# EAGLE board PWM sheild d1 mini v1 (EAGLE 9.6.2)
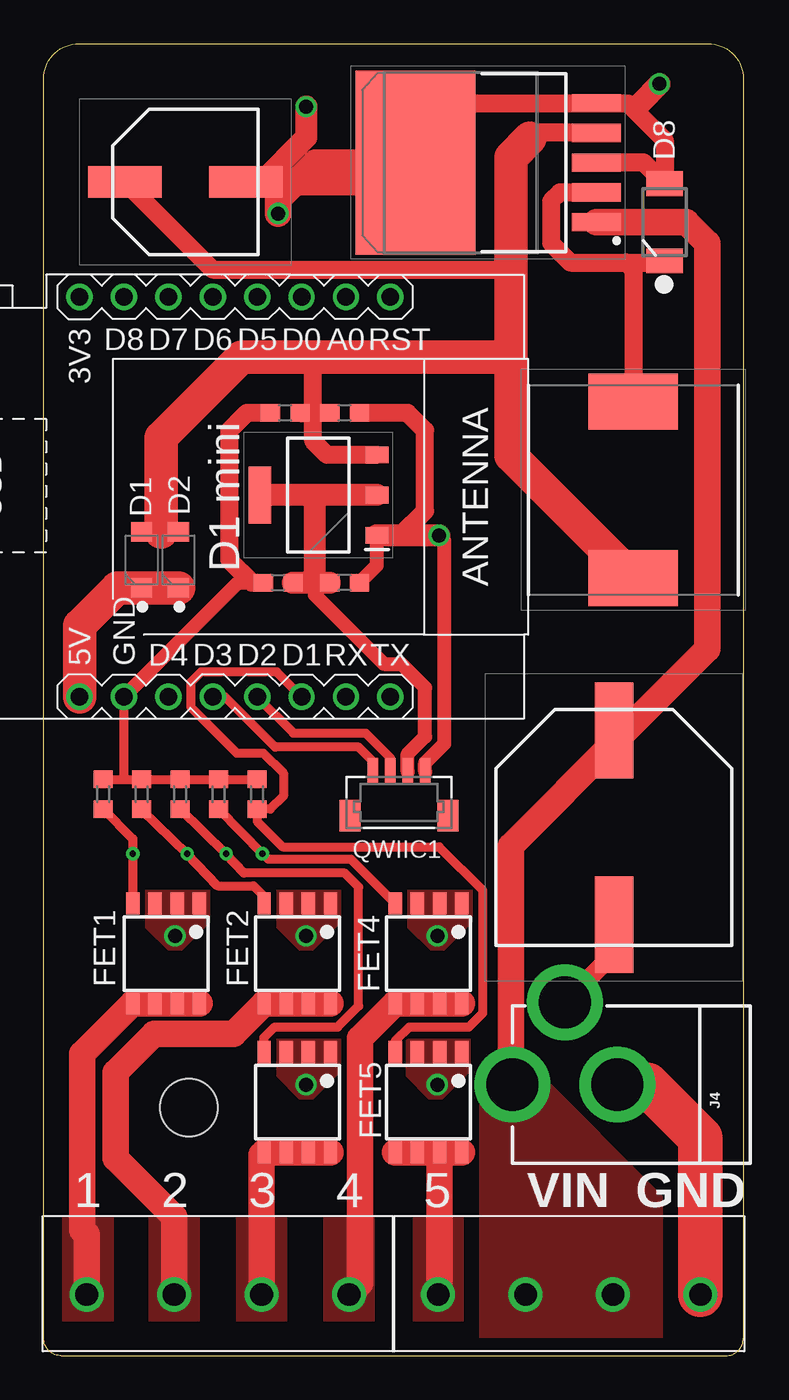
[diagram p0: board, top side]
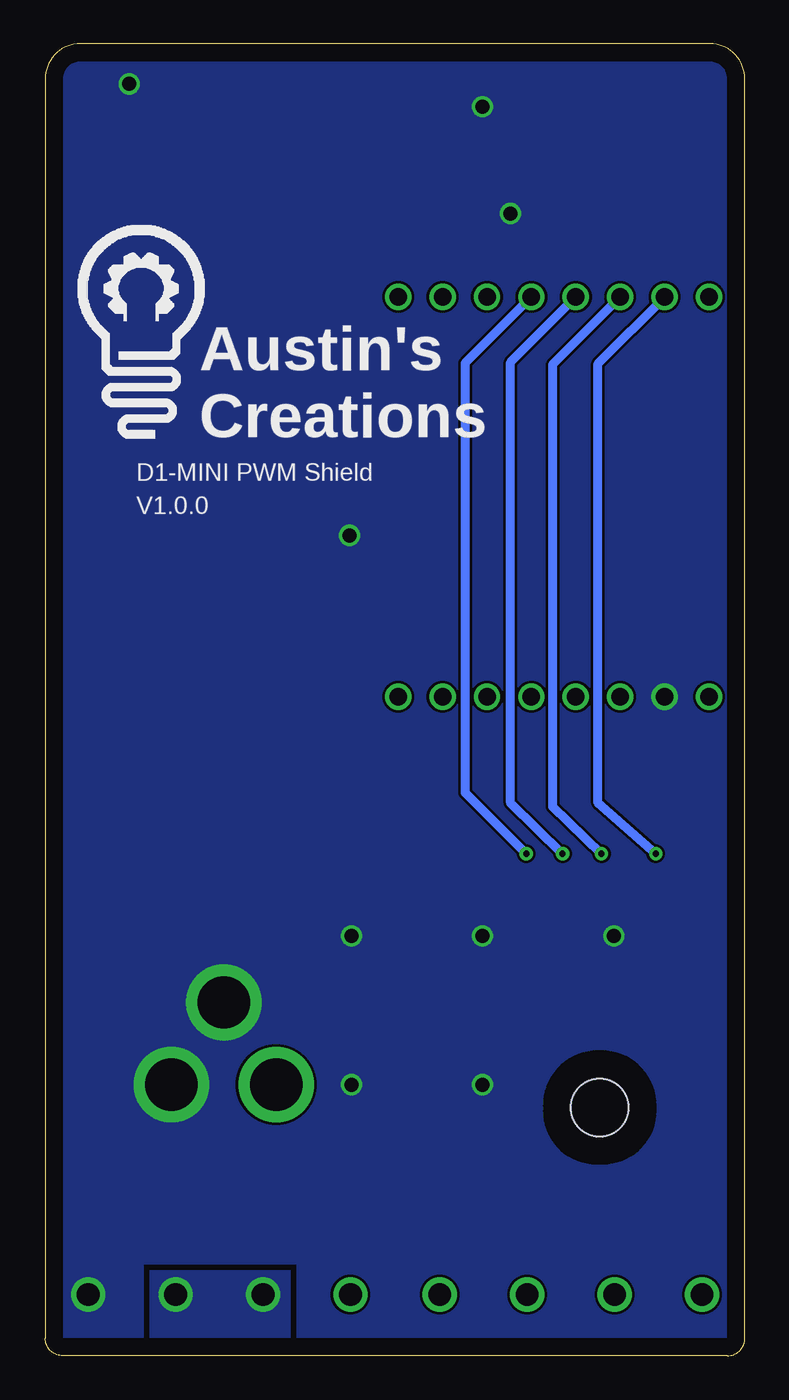
[diagram p1: board, bottom side, seen from below]

Size 40 x 75 mm. Coordinates in mm from the lower left corner, seen from the top.
Outline: 1,0 39,0 arc90 40,1 40,73 arc90 38,75 2,75 arc90 0,73 0,1 arc90 1,0
Copper layers (1*16): Top 0.035mm / dielectric 1.5mm / Bottom 0.035mm
Design rules "default": minimum track width 6mil, minimum drill 0.35mm, track to track 6mil, track to pad 6mil, pad to pad 6mil, via to via 6mil, smd to smd 6mil, copper to edge 40mil, drill to drill 6mil, minimum pad ring 10mil, minimum via ring 8mil, stop-mask expansion 4mil, vias tented up to drill 0mil, thermal gap 10mil
bRestrict: area 5.1,11 to 11.5,17.4

## Footprints (pad centres in the part's own frame; a part is rotated, then mirrored left to right if it is on the bottom)
C0603 = smd 1.1 x 1: 1 -0.85,0; 2 0.85,0
CAPAE1350X1400N = smd 5.5 x 2.2: 1 -5.55,0; 2 5.55,0
CAPAE830X650N = smd 4.2 x 1.8: 1 -3.45,0; 2 3.45,0
SODFL3718X125N = smd 1.12 x 1.22: 1 -1.6,0; 2 1.6,0
PMEG3050EP115 = smd 1.4 x 2.1: 1 -2.2,0; 2 2.2,0
SM4838NSK = smd 0.76 x 1.27: D1 -1.905,2.86; D2 -0.635,2.86; D3 0.635,2.86; D4 1.905,2.86; G 1.905,-2.86; S1 -1.905,-2.86; S2 -0.635,-2.86; S3 0.635,-2.86
SOT229P700X180-4N = smd 1.3 x 0.95: 1 -3.35,2.29; 2 -3.35,0; 3 -3.35,-2.29 | smd 1.3 x 3.25: 4 3.35,0
TO170P1435X465-6N = smd 2.8 x 1.05: 1 -6.2,3.4; 2 -6.2,1.7; 3 -6.2,0; 4 -6.2,-1.7; 5 -6.2,-3.4 | smd 6.85 x 10.5: 6 4.15,0
SCREWTERMINAL-4P-5MM = drill 1.3 pad 1.95: 1 0,0; 2 5,0; 3 10,0; 4 15,0
POWER_JACK_PTH = drill 2.997 pad 4.318: GND 0,7.7; GNDBREAK 4.7,10.7; PWR 0,13.7
INDPM120120X800N = smd 3.2 x 5.1: 1 -5.05,0; 2 5.05,0
BM04B-SRSS-TB = smd 0.6 x 1.55: 1 1.5,0; 2 0.5,0; 3 -0.5,0; 4 -1.5,0 | smd 1.2 x 1.8: M1 2.8,-2.525; M2 -2.8,-2.525
R0603 = smd 1 x 1.1: 1 -0.85,0; 2 0.85,0
M3BOLTHOLE = hole 3.3: 0,0
WEMOS-D1-MINI = drill 1: JP1.1 -11.43,9.525; JP1.2 -11.43,6.985; JP1.3 -11.43,4.445; JP1.4 -11.43,1.905; JP1.5 -11.43,-0.635; JP1.6 -11.43,-3.175; JP1.7 -11.43,-5.715; JP1.8 -11.43,-8.255; JP2.1 11.43,9.525; JP2.2 11.43,6.985; JP2.3 11.43,4.445; JP2.4 11.43,1.905; JP2.5 11.43,-0.635; JP2.6 11.43,-3.175; JP2.7 11.43,-5.715; JP2.8 11.43,-8.255

## Placement (x,y rotation side)
C1  100nf  [C0603]  17.2,53.9 0 top
C2  10uf  [C0603]  13.8,53.9 180 top
C3  100nf  [C0603]  17.2,44.2 180 top
C4  10uf  [C0603]  13.4,44.2 0 top
C5  RVT1V681M1213-680uf-35v  [CAPAE1350X1400N]  32.6,30.2 270 top
C6  EEEFC0J221AP-220uf-6.3v  [CAPAE830X650N]  8.1,67.1 0 top
D1  SM4007PL  [SODFL3718X125N]  5.6,45.5 90 top
D2  SM4007PL  [SODFL3718X125N]  7.7,45.5 90 top
D8  PMEG3050EP,115  [PMEG3050EP115]  35.5,64.8 90 top
FET1  SM4838NSK  [SM4838NSK]  7,23 180 top
FET2  SM4838NSK  [SM4838NSK]  14.5,23 180 top
FET3  SM4838NSK  [SM4838NSK]  14.5,14.5 180 top
FET4  SM4838NSK  [SM4838NSK]  22,23 180 top
FET5  SM4838NSK  [SM4838NSK]  22,14.5 180 top
IC1  AMS1117-3.3V  [SOT229P700X180-4N]  15.7,49.2 180 top
IC2  LM2596S-5.0  [TO170P1435X465-6N]  25.4,68.2 180 top
J1  SCREWTERMINAL-4P-5MM  [SCREWTERMINAL-4P-5MM]  2.45,3.5 0 top
J3  SCREWTERMINAL-4P-5MM  [SCREWTERMINAL-4P-5MM]  22.55,3.5 0 top
J4  POWER_JACK  [POWER_JACK_PTH]  40.5,15.5 90 top
L1  SMDRI127-330MT  [INDPM120120X800N]  33.7,49.5 270 top
QWIIC1  QWIICUPRIGHT  [BM04B-SRSS-TB]  20.3,33.4 0 top
R1  [R0603]  3.4,32.1 270 top
R2  [R0603]  5.6,32.1 270 top
R3  [R0603]  7.8,32.1 270 top
R4  [R0603]  10,32.1 270 top
R5  [R0603]  12.2,32.1 270 top
U$1  M3BOLTHOLE  [M3BOLTHOLE]  8.3,14.2 0 top
U$3  WEMOS-D1-MINI  [WEMOS-D1-MINI]  10.3,49.1 270 top
U$4  LOGOMED  [LOGOMED]  38.8,52.1 0 bottom

## Library data of the parts
C1-C4 = rcl; SPICEPREFIX: C
C5 = SamacSys_Parts; DESCRIPTION: Aluminium Electrolytic Capacitors - SMD 35VDC 680uF 20% AEC-Q200; HEIGHT: 14mm; MANUFACTURER_NAME: Panasonic; MANUFACTURER_PART_NUMBER: EEE-HD1V681AQ; MOUSER_PART_NUMBER: 667-EEE-HD1V681AQ; MOUSER_PRICE-STOCK: https://www.mouser.co.uk/ProductDetail/Panasonic/EEE-HD1V681AQ?qs=w%2Fv1CP2dgqoW7i2Hoqi%252B9w%3D%3D
C6 = SamacSys_Parts; DESCRIPTION: PANASONIC - EEEFC0J221AP - SMD Aluminium Electrolytic Capacitor, Radial Can - SMD, 220 F, 6.3 V, EEEFC Series; HEIGHT: 6.5mm; MANUFACTURER_NAME: Panasonic; MANUFACTURER_PART_NUMBER: EEEFC0J221AP
D1 D2 = SamacSys_Parts; DESCRIPTION: 1kV 1A 1.1V @ 1A SOD-123FL Diodes - General Purpose RoHS; HEIGHT: 1.25mm; MANUFACTURER_NAME: MDD(Microdiode Electronics); MANUFACTURER_PART_NUMBER: SM4007PL
D8 = SamacSys_Parts; ARROW_PART_NUMBER: PMEG3050EP,115; ARROW_PRICE-STOCK: https://www.arrow.com/en/products/pmeg3050ep115/nexperia; DESCRIPTION: NXP PMEG3050EP,115 SMT Schottky Diode, 30V 5A, 2-Pin SOD-128; HEIGHT: 1mm; MANUFACTURER_NAME: Nexperia; MANUFACTURER_PART_NUMBER: PMEG3050EP,115; MOUSER_PART_NUMBER: 771-PMEG3050EP115; MOUSER_PRICE-STOCK: https://www.mouser.co.uk/ProductDetail/Nexperia/PMEG3050EP115?qs=GcY6OjH1zdmnjQ%2FhUT5aOA%3D%3D
FET1-FET5 QWIIC1 U$1 U$4 = custom parts
IC1 = SamacSys_Parts; DESCRIPTION: 1A LOW DROPOUT VOLTAGE REGULATOR, SOT-223; HEIGHT: 1.8mm; MANUFACTURER_NAME: Advanced Monolithic Systems; MANUFACTURER_PART_NUMBER: ams1117-3.3v
IC2 = SamacSys_Parts; DESCRIPTION: SIMPLE SWITCHER&#174; 4.5V to 40V, 3A Low Component Count Step-Down Regulator; HEIGHT: 4.65mm; MANUFACTURER_NAME: Texas Instruments; MANUFACTURER_PART_NUMBER: LM2596S-3.3/NOPB; MOUSER_PART_NUMBER: 926-LM2596S-3.3/NOPB; MOUSER_PRICE-STOCK: https://www.mouser.co.uk/ProductDetail/Texas-Instruments/LM2596S-33-NOPB?qs=X1J7HmVL2ZHsEwG9Q6doow%3D%3D
J1 J3 = SamacSys_Parts; DESCRIPTION: Fixed Terminal Blocks Terminal block, screw type, 5.00, horizontal, 4 poles, CUI Blue, slotted screw, PCB mount; HEIGHT: 12.9mm; MANUFACTURER_NAME: CUI Inc.; MANUFACTURER_PART_NUMBER: TB001-500-04BE; MOUSER_PART_NUMBER: 490-TB001-500-04BE; MOUSER_PRICE-STOCK: https://www.mouser.co.uk/ProductDetail/CUI-Devices/TB001-500-04BE?qs=vLWxofP3U2xFd1xqNcHXZA%3D%3D
J4 = custom parts; PROD_ID: CONN-08197
L1 = SamacSys_Parts; DESCRIPTION: Fixed Inductors 33uH 3.9A; HEIGHT: 8mm; MANUFACTURER_NAME: Sumida; MANUFACTURER_PART_NUMBER: CDRH127/LDNP-330MC; MOUSER_PART_NUMBER: 851-CDRH127LDNP330MC; MOUSER_PRICE-STOCK: https://www.mouser.co.uk/ProductDetail/Sumida/CDRH127-LDNP-330MC?qs=rZntyWl5IYHj3wgmnQ0WOg%3D%3D
R1-R5 = rcl; SPICEPREFIX: R
U$3 = diy-modules

## Nets
1: FET1.D1 FET1.D2 FET1.D3 FET1.D4 J1.1
2: FET2.D1 FET2.D2 FET2.D3 FET2.D4 J1.2
3: FET3.D1 FET3.D2 FET3.D3 FET3.D4 J1.3
3.3V: C3.2 C4.2 IC1.2 IC1.4 QWIIC1.2
3V3: U$3.JP1.8
4: FET4.D1 FET4.D2 FET4.D3 FET4.D4 J1.4
5: FET5.D1 FET5.D2 FET5.D3 FET5.D4 J3.1
FET1: FET1.G R1.2 U$3.JP1.7
FET2: FET2.G R2.2 U$3.JP1.6
FET3: FET3.G R3.2 U$3.JP1.5
FET4: FET4.G R4.2 U$3.JP1.4
FET5: FET5.G R5.2 U$3.JP2.3
GND: C1.2 C2.2 C3.1 C4.1 C5.2 C6.2 D8.2 FET1.S1 FET1.S2 FET1.S3 FET2.S1 FET2.S2 FET2.S3 FET3.S1 FET3.S2 FET3.S3 FET4.S1 FET4.S2 FET4.S3 FET5.S1 FET5.S2 FET5.S3 IC1.1 IC2.3 IC2.5 IC2.6 J3.4 J4.GND J4.GNDBREAK QWIIC1.1 R1.1 R2.1 R3.1 R4.1 R5.1 U$3.JP2.7
N$2: D1.1 D2.1 U$3.JP2.8
N$20: D8.1 IC2.2 L1.1
SCL: QWIIC1.4 U$3.JP2.5
SDA: QWIIC1.3 U$3.JP2.4
VCC: C1.1 C2.1 C6.1 D1.2 D2.2 IC1.3 IC2.4 L1.2
VDD: C5.1 IC2.1 J3.2 J3.3 J4.PWR

## Tracks (layer width: path | path; a pad name or v marks a point on that pad's centre or on a via)
1
  Top 1.524: FET1.D1 FET1.D2 FET1.D3 FET1.D4 2.2,17.25 2.2,7.2 2.45,6.95 J1.1
  pour Top (no thermals): 1,7.9 1,2 4,2 4,7.9
2
  Top 1.524: FET2.D1 FET2.D2 FET2.D3 FET2.D4 10.86,18.4 6.3,18.4 4.1,16.2 4.1,11.3 7.45,7.95 J1.2
  pour Top (no thermals): 6,7.9 6,2 8.9,2 8.9,7.9
3
  Top 1.524: FET3.D1 FET3.D2 FET3.D3 FET3.D4 12.45,11.49 J1.3
  pour Top (no thermals): 11,7.9 11,2 13.9,2 13.9,7.9
3.3V
  Top 0.813: QWIIC1.2 20.8,34.4 21.8,35.4 21.8,38.2 20.45,39.55 19.45,39.55 15.5,43.5 15.5,43.8 15.1,44.2
  Top 1.27: IC1.2 15.5,49.2 | 15.5,49.2 IC1.4 | C4.2 15.1,44.2 | 15.1,44.2 C3.2 | 15.1,44.2 15.5,44.6 15.5,49.2
4
  Top 1.524: FET4.D1 FET4.D2 FET4.D3 FET4.D4 18.1,18.14 18.1,4.15 J1.4
  pour Top (no thermals): 16,7.9 16,2 18.9,2 18.9,7.9
5
  Top 1.524: FET5.D1 FET5.D2 | FET5.D2 FET5.D3 FET5.D4 | FET5.D2 22.64,3.58 J3.1
  pour Top (no thermals): 21.1,7.9 21.1,2 24,2 24,7.9
FET1  (via drill 0.35)
  Top 0.508: R1.2 5.09,29.55 v5.09,28.7 FET1.G
  Bottom 0.508: v5.09,28.7 8.4,31.61 8.4,56.7 4.58,60.52 U$3.JP1.7
FET2  (via drill 0.35)
  Top 0.508: R2.2 5.6,31.2 v8.2,28.7 9.94,26.86 11.99,26.86 12.6,26.26 FET2.G
  Bottom 0.508: U$3.JP1.6 11,56.66 11,31.4 v8.2,28.7
FET3  (via drill 0.35)
  Top 0.508: FET3.G 12.6,18.2 13.2,18.8 16.8,18.8 18,20 18,26.8 17.2,27.6 11.45,27.6 v10.43,28.7 R3.2
  Bottom 0.508: v10.43,28.7 13.4,31.6 13.4,56.8 U$3.JP1.5
FET4  (via drill 0.35)
  Top 0.508: R4.2 v12.5,28.7 12.85,28.4 17.55,28.4 FET4.G
  Bottom 0.508: U$3.JP1.4 16,56.73 16,32.2 v12.5,28.7
FET5
  Top 0.508: FET5.G 20.09,18 20.9,18.8 24.3,18.8 25.1,19.6 25.1,26.6 22.6,29.1 13.65,29.1 12.2,30.55 R5.2 12.95,31.25 13.7,32 13.7,33.3 12.54,34.46 11.04,34.46 8.4,37.09 8.4,38.5 9,39.1 13.31,39.1 U$3.JP2.3
GND  (via drill 0.8)
  Top 0.508: R1.1 4.5,32.95 | 4.5,32.95 R2.1 R3.1 R4.1 R5.1 | U$3.JP2.7 4.58,33.03 4.5,32.95
  Top 0.813: U$3.JP2.7 11.12,44.2 11.9,44.2 | C3.1 19.05,45.2 IC1.1 | 34.1,71.6 IC2.5 | QWIIC1.1 21.8,33.9 22.9,35 22.9,46.6 v22.6,46.9
  Top 1.016: J4.GNDBREAK 32.6,23 C5.2 | IC2.3 34.3,68.2 D8.2 35.5,69.5 33.4,71.6 IC2.5 24.65,71.6 | IC1.1 20.41,46.91 21.8,48.3 21.8,52.9 20.8,53.9 C1.2 | C2.2 11.6,53.9 10.6,52.9 10.6,45.5 11.9,44.2 C4.1
  Top 1.27: v15,71.4 15,69.65 12.45,67.1 C6.2 | v35.2,72.7 34.1,71.6 | IC1.1 v22.59,46.91 v22.6,46.9
  Top 1.524: v13.4,65.3 13.4,66.1 15.5,68.2 IC2.6 20.15,67.1 C6.2
  Top 2.54: J4.GND 34.5,15.5 37.55,12.45 J3.4
  other vias: 22.5,24 15,24 7.5,24 15,15.5 22.5,15.5
  pour Top (no thermals): 20.8,26.6 20.8,24.5 22.1,23.2 22.9,23.2 24.5,24.8 24.5,26.6
  pour Top (no thermals): 13.3,26.6 13.3,24.5 14.6,23.2 15.4,23.2 17,24.8 17,26.6
  pour Top (no thermals): 5.8,26.6 5.8,24.5 7.1,23.2 7.9,23.2 9.5,24.8 9.5,26.6
  pour Top (no thermals): 13.3,18.1 13.3,16 14.6,14.7 15.4,14.7 17,16.3 17,18.1
  pour Top (no thermals): 20.7,18.1 20.7,16 22,14.7 22.8,14.7 24.4,16.3 24.4,18.1
  pour Bottom (no thermals): 0,0 0,75 1.9,75 40,75 40,0 34.4,0 34.4,1 34.4,5.3 33.3,5.3 25.6,5.3 25.6,3.4 25.6,0
N$2
  Top 1.016: D2.1 D1.1
  Top 1.905: U$3.JP2.8 2.04,41.74 4.2,43.9 D2.1
N$20
  Top 1.016: IC2.2 29.5,66.5 29,66 29,63.6 30.1,62.5 33.3,62.5 | 33.3,62.5 35.4,62.5 D8.1 | 33.3,62.5 33.7,62.1 L1.1
SCL
  Top 0.508: QWIIC1.4 18.8,34 18,34.8 13.23,34.8 10.37,37.67 U$3.JP2.5
SDA
  Top 0.508: U$3.JP2.4 14.28,35.6 18.4,35.6 19.8,34.2 QWIIC1.3
VCC
  Top 1.016: D1.2 6.7,47.1 D2.2 | C2.1 15.4,53.9 | C1.1 15.4,53.9 | IC2.4 28.3,69.9 28,69.6 27.8,69.6 | IC1.3 16.21,51.49 15.4,52.3 15.4,53.9 | 15.4,53.9 15.4,57.1 | 26.7,62.1 9.65,62.1 C6.1
  Top 1.905: 27.8,69.6 26.7,68.5 26.7,62.1 26.7,57.1 | 26.7,57.1 26.7,51.45 L1.2 | 6.7,47.1 6.7,52.5 11.3,57.1 15.4,57.1 26.7,57.1
VDD
  Top 1.016: 32.95,35.4 C5.1
  Top 1.524: IC2.1 36.74,64.8 37.95,63.59 37.95,40.4 32.95,35.4 26.7,29.15 26.7,25.5 26.7,15.6 J4.PWR
  pour Top (no thermals): 24.9,7.9 24.9,0.3 35.4,0.3 35.4,7.9
  pour Bottom (no thermals): 26,4.9 26,1 34,1 34,4.9
  pour Top (no thermals): 24.9,16.25 24.9,7.9 35.4,7.9 35.4,9.1 28.25,16.25

## Text on the board
tPlace: 1 | 2 | 3 | 4 | 5 | VIN
bPlace: Austin's / Creations | D1-MINI PWM Shield | V1.0.0
tNames: GND